# Altium PCB 24line-control-panel.PcbDoc
Units mil, origin at the board's own origin, x right, y up, seen from the top; angles counter-clockwise.
Board outline 15000 x 3500 mil, 2 copper layers (Top Layer, Bottom Layer); 73 components, 50 nets, 205 pads, 0 vias.
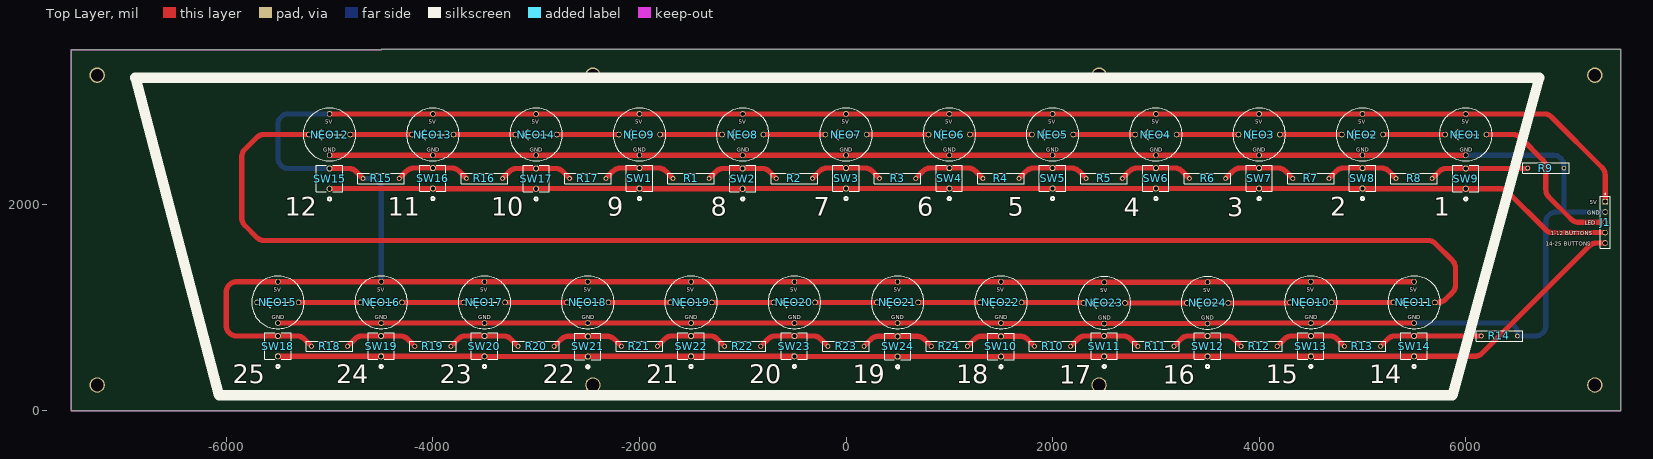
[diagram p0: Top Layer view]
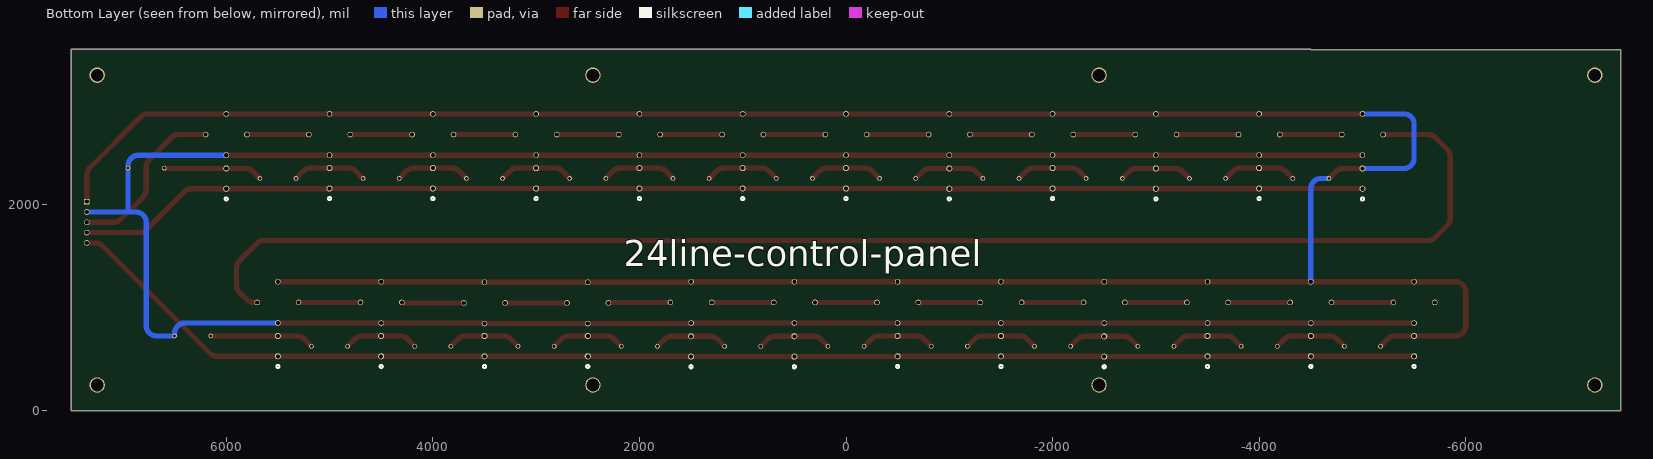
[diagram p1: Bottom Layer view, seen from below]
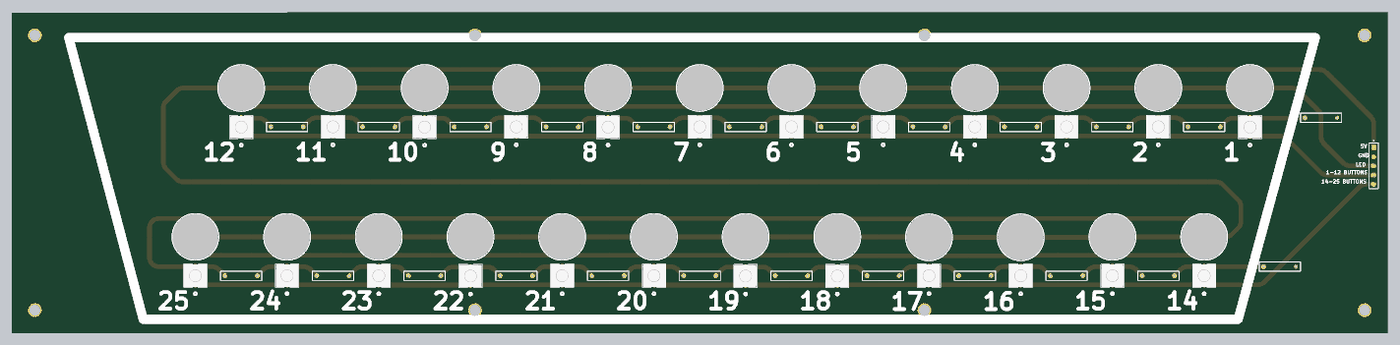
[diagram p2: 3D render of the assembled board from above, using the file's embedded part models]

## Layer stack, top to bottom
Top Solder: solder mask 0.4, Solder Resist, Dk 3.5
Top Layer: signal copper 1.4
Dielectric 1: dielectric 12.6, FR-4, Dk 4.8
Bottom Layer: signal copper 1.4
Bottom Solder: solder mask 0.4, Solder Resist, Dk 3.5

## Board outline
-7500,0 -7500,3495 -4500,3495 -4500,3500 7500,3500 7500,5 7500,0

## Design rules (kind name [scope] priority, off if disabled: settings)
Clearance [All] p1: gap=10 ignorepadtopadclearanceinfootprint=FALSE except(0: Arc-Hole Track-Hole SMDPad-Hole THPad-Hole Via-Hole Fill-Hole Poly-Hole Region-Hole Text-Hole)
PolygonConnect [All] p1: connectstyle=Relief reliefconductorwidth=10 reliefentries=4 polygonreliefangle="90 Angle" airgapwidth=10
RoutingVias [All] p1: holewidth=28 width=50 viastyle="Through Hole" minholewidth=28 minwidth=50 maxholewidth=28 maxwidth=50
SolderMaskExpansion [All] p1: expansion=4 istentingtop=FALSE
Width [All] p1: maxlimit=150 minlimit=10 preferedwidth=50 toplayer_maxwidth=100 minimp=50.000000 maximp=50.000000 favimp=50.000000
30 further rules are at their usual default settings.

## Components (designator, comment, footprint, x,y, rotation, side; value= is the part's Value field where it differs from the comment)
J1 "TSW-105-07-G-S" SAMTEC_TSW-105-07-G-S 7350,1825 r270 top
NEO1 "adafruit-1559-neopixel-flora" adafruit-1559-neopixel-flora 6000,2675 r0 top
NEO2 "adafruit-1559-neopixel-flora" adafruit-1559-neopixel-flora 5000,2675 r0 top
NEO3 "adafruit-1559-neopixel-flora" adafruit-1559-neopixel-flora 4000,2675 r0 top
NEO4 "adafruit-1559-neopixel-flora" adafruit-1559-neopixel-flora 3000,2675 r0 top
NEO5 "adafruit-1559-neopixel-flora" adafruit-1559-neopixel-flora 2000,2675 r0 top
NEO6 "adafruit-1559-neopixel-flora" adafruit-1559-neopixel-flora 1000,2675 r0 top
NEO7 "adafruit-1559-neopixel-flora" adafruit-1559-neopixel-flora 0,2675 r0 top
NEO8 "adafruit-1559-neopixel-flora" adafruit-1559-neopixel-flora -1000,2675 r0 top
NEO9 "adafruit-1559-neopixel-flora" adafruit-1559-neopixel-flora -2000,2675 r0 top
NEO10 "adafruit-1559-neopixel-flora" adafruit-1559-neopixel-flora 4500,1050 r0 top
NEO11 "adafruit-1559-neopixel-flora" adafruit-1559-neopixel-flora 5500,1050 r0 top
NEO12 "adafruit-1559-neopixel-flora" adafruit-1559-neopixel-flora -5000,2675 r0 top
NEO13 "adafruit-1559-neopixel-flora" adafruit-1559-neopixel-flora -4000,2675 r0 top
NEO14 "adafruit-1559-neopixel-flora" adafruit-1559-neopixel-flora -3000,2675 r0 top
NEO15 "adafruit-1559-neopixel-flora" adafruit-1559-neopixel-flora -5500,1050 r0 top
NEO16 "adafruit-1559-neopixel-flora" adafruit-1559-neopixel-flora -4500,1050 r0 top
NEO17 "adafruit-1559-neopixel-flora" adafruit-1559-neopixel-flora -3500,1050 r0 top
NEO18 "adafruit-1559-neopixel-flora" adafruit-1559-neopixel-flora -2500,1050 r0 top
NEO19 "adafruit-1559-neopixel-flora" adafruit-1559-neopixel-flora -1500,1050 r0 top
NEO20 "adafruit-1559-neopixel-flora" adafruit-1559-neopixel-flora -500,1050 r0 top
NEO21 "adafruit-1559-neopixel-flora" adafruit-1559-neopixel-flora 500,1050 r0 top
NEO22 "adafruit-1559-neopixel-flora" adafruit-1559-neopixel-flora 1500,1050 r0 top
NEO23 "adafruit-1559-neopixel-flora" adafruit-1559-neopixel-flora 2500,1045 r0 top
NEO24 "adafruit-1559-neopixel-flora" adafruit-1559-neopixel-flora 3500,1045 r0 top
R1 "Resistor" "thruhole resistor" -1500,2250 r180 top
R2 "Resistor" "thruhole resistor" -500,2250 r180 top
R3 "Resistor" "thruhole resistor" 500,2250 r180 top
R4 "Resistor" "thruhole resistor" 1500,2250 r180 top
R5 "Resistor" "thruhole resistor" 2500,2250 r180 top
R6 "Resistor" "thruhole resistor" 3500,2250 r180 top
R7 "Resistor" "thruhole resistor" 4500,2250 r180 top
R8 "Resistor" "thruhole resistor" 5500,2250 r180 top
R9 "Resistor" "thruhole resistor" 6775,2350 r180 top
R10 "Resistor" "thruhole resistor" 2000,625 r180 top
R11 "Resistor" "thruhole resistor" 3000,625 r180 top
R12 "Resistor" "thruhole resistor" 4000,625 r180 top
R13 "Resistor" "thruhole resistor" 5000,625 r180 top
R14 "Resistor" "thruhole resistor" 6325,725 r180 top
R15 "Resistor" "thruhole resistor" -4500,2250 r180 top
R16 "Resistor" "thruhole resistor" -3500,2250 r180 top
R17 "Resistor" "thruhole resistor" -2500,2250 r180 top
R18 "Resistor" "thruhole resistor" -5000,625 r180 top
R19 "Resistor" "thruhole resistor" -4000,625 r180 top
R20 "Resistor" "thruhole resistor" -3000,625 r180 top
R21 "Resistor" "thruhole resistor" -2000,625 r180 top
R22 "Resistor" "thruhole resistor" -1000,625 r180 top
R23 "Resistor" "thruhole resistor" 0,625 r180 top
R24 "Resistor" "thruhole resistor" 1000,625 r180 top
SW1 "TL59AF100Q" SW_TL59AF100Q_EWI -2000,2153.15 r90 top
SW2 "TL59AF100Q" SW_TL59AF100Q_EWI -1000,2150 r90 top
SW3 "TL59AF100Q" SW_TL59AF100Q_EWI 0,2153.15 r90 top
SW4 "TL59AF100Q" SW_TL59AF100Q_EWI 1000,2153.15 r90 top
SW5 "TL59AF100Q" SW_TL59AF100Q_EWI 2000,2153.15 r90 top
SW6 "TL59AF100Q" SW_TL59AF100Q_EWI 3000,2153.15 r90 top
SW7 "TL59AF100Q" SW_TL59AF100Q_EWI 4000,2153.15 r90 top
SW8 "TL59AF100Q" SW_TL59AF100Q_EWI 5000,2153.15 r90 top
SW9 "TL59AF100Q" SW_TL59AF100Q_EWI 6000,2150 r90 top
SW10 "TL59AF100Q" SW_TL59AF100Q_EWI 1500,525 r90 top
SW11 "TL59AF100Q" SW_TL59AF100Q_EWI 2500,528.15 r90 top
SW12 "TL59AF100Q" SW_TL59AF100Q_EWI 3500,528.15 r90 top
SW13 "TL59AF100Q" SW_TL59AF100Q_EWI 4500,528.15 r90 top
SW14 "TL59AF100Q" SW_TL59AF100Q_EWI 5500,528.15 r90 top
SW15 "TL59AF100Q" SW_TL59AF100Q_EWI -5000,2150 r90 top
SW16 "TL59AF100Q" SW_TL59AF100Q_EWI -4000,2153.15 r90 top
SW17 "TL59AF100Q" SW_TL59AF100Q_EWI -3000,2150 r90 top
SW18 "TL59AF100Q" SW_TL59AF100Q_EWI -5500,528.15 r90 top
SW19 "TL59AF100Q" SW_TL59AF100Q_EWI -4500,528.15 r90 top
SW20 "TL59AF100Q" SW_TL59AF100Q_EWI -3500,528.15 r90 top
SW21 "TL59AF100Q" SW_TL59AF100Q_EWI -2500,525 r90 top
SW22 "TL59AF100Q" SW_TL59AF100Q_EWI -1500,528.15 r90 top
SW23 "TL59AF100Q" SW_TL59AF100Q_EWI -500,528.15 r90 top
SW24 "TL59AF100Q" SW_TL59AF100Q_EWI 500,525 r90 top

## Footprints (in the part's own frame and the unit in brackets; to place one, negate y for a bottom-side part, rotate by r counter-clockwise, add the part's x,y. Pads: shape width x height; smd on the part's side, far side on the other; paste and mask are expansions set on the pad)
adafruit-1559-neopixel-flora [mm]
  round 1.37 hole 1.02: 5V(0,5.08) GND(0,-5.08) IN(5.08,0) OUT(-5.08,0)
  silkscreen extent -6.48,-6.48 6.48,6.48, body extent -6.35,-6.35 6.35,6.35, height 2.4
SAMTEC_TSW-105-07-G-S [mm]
  rect 1.37x1.37 hole 1.02: 01(-5.08,0)
  round 1.37 hole 1.02: 02(-2.54,0) 03(0,0) 04(2.54,0) 05(5.08,0)
  silkscreen extent -7.1,-1.27 6.35,1.27, body extent -6.48,-1.27 6.35,1.27, height 1.44
SW_TL59AF100Q_EWI [mil]
  round 59 / inner round 60 / far side round 59 hole 39 paste-99999 mask+0: 1(0,0) 2(196.85,0)
  silkscreen extent -114,-127 225,127, body extent -24,-122 220,122, height 202
"thruhole resistor" [mil] "thruhole resistor"
  round 45 hole 30: 1(-175,0) 2(175,0)
  silkscreen extent -225,-50 225,50

## Part data
J1: Package=None, Availability=Unavailable, MF="Samtec Inc.", MP=TSW-105-07-G-S, Price=None
SW1 SW2 SW3 SW4 SW5 SW6 SW7 SW8 SW9 SW10 SW11 SW12 SW13 SW14 SW15 SW16 SW17 SW18 SW19 SW20 SW21 SW22 SW23 SW24: "No Description Available", Mfr_Name=E-Switch, Copyright="Copyright (C) 2024 Ultra Librarian. All rights reserved.", Manufacturer_Part_Number=TL59AF100Q, RefDes=RefDes, Type=DEV

## Free pads (board coordinates)
  round 150 hole 123 unplated: 8(-7250,250) 8(-7250,3250) 8(-2450,250) 8(-2450,3250) 8(2450,250) 8(2450,3250) 8(7250,250) 8(7250,3250)

## Nets (pads, with @x,y where several pads share a name; then routed paths per layer and width w, separated by ;. In a path a pad name is that pad's centre, name@x,y a point inside that pad or via, vN(x,y) a via of type N, cw(c..) or ccw(c..) an arc to the next point about the centre after c; other vN are vias at no path point)
GND: J1.02 NEO1.GND NEO2.GND NEO3.GND NEO4.GND NEO5.GND NEO6.GND NEO7.GND NEO8.GND NEO9.GND NEO10.GND NEO11.GND NEO12.GND NEO13.GND NEO14.GND NEO15.GND NEO16.GND NEO17.GND NEO18.GND NEO19.GND NEO20.GND NEO21.GND NEO22.GND NEO23.GND NEO24.GND R9.1 R14.1 | length 26513.3
  Top Layer w50: NEO15.GND NEO16.GND NEO17.GND NEO18.GND NEO19.GND NEO20.GND NEO21.GND NEO22.GND 1500,845 NEO23.GND NEO24.GND 3500,850 NEO10.GND NEO11.GND ; NEO12.GND NEO13.GND NEO14.GND NEO9.GND NEO8.GND NEO7.GND NEO6.GND NEO5.GND NEO4.GND NEO3.GND NEO2.GND NEO1.GND
  Bottom Layer w50: NEO11.GND 6400,850 cw(c6400,750) 6500,750 R14.1 6675,725 ccw(c6675,825) 6775,825 6775,1825 cw(c6875,1825) 6875,1925 6950,1925 ; NEO1.GND 6850,2475 cw(c6850,2375) 6950,2375 R9.1 6950,1925 ; J1.02 6950,1925
NetJ1_01: J1.01 NEO1.5V NEO2.5V NEO3.5V NEO4.5V NEO5.5V NEO6.5V NEO7.5V NEO8.5V NEO9.5V NEO10.5V NEO11.5V NEO12.5V NEO13.5V NEO14.5V NEO15.5V NEO16.5V NEO17.5V NEO18.5V NEO19.5V NEO20.5V NEO21.5V NEO22.5V NEO23.5V NEO24.5V R15.2 R18.2 SW15.2 SW18.2 | length 28615.7
  Top Layer w50: R18.2 -5245.71,695.71 ccw(c-5316.42,625) -5316.42,725 SW18.2 -5900,725 cw(c-5900,825) -6000,825 -6000,1150 cw(c-5900,1150) -5900,1250 NEO15.5V NEO16.5V NEO17.5V NEO18.5V NEO19.5V NEO20.5V NEO21.5V NEO22.5V 1500,1245 NEO23.5V NEO24.5V 3500,1250 NEO10.5V NEO11.5V ; SW15.2 -4813.27,2346.85 cw(c-4813.27,2246.85) -4742.56,2317.56 R15.2 ; NEO12.5V NEO13.5V NEO14.5V NEO9.5V NEO8.5V NEO7.5V NEO6.5V NEO5.5V NEO4.5V NEO3.5V NEO2.5V NEO1.5V 6758.58,2875 cw(c6758.58,2775) 6829.29,2845.71 7320.71,2354.29 cw(c7250,2283.58) 7350,2283.58 J1.01
  Bottom Layer w50: SW15.2 -5400,2346.85 cw(c-5400,2446.85) -5500,2446.85 -5500,2775 cw(c-5400,2775) -5400,2875 NEO12.5V ; R15.2 -4600,2250 cw(c-4600,2150) -4500,2150 NEO16.5V
NetJ1_03: J1.03 NEO1.IN | length 1660.6
  Top Layer w50: NEO1.IN 6458.58,2675 cw(c6458.58,2575) 6529.29,2645.71 6745.71,2429.29 cw(c6675,2358.58) 6775,2358.58 6775,2141.42 ccw(c6875,2141.42) 6804.29,2070.71 7020.71,1854.29 ccw(c7091.42,1925) 7091.42,1825 J1.03
NetJ1_04: J1.04 SW1.1 SW2.1 SW3.1 SW4.1 SW5.1 SW6.1 SW7.1 SW8.1 SW9.1 SW15.1 SW16.1 SW17.1 | length 12522.5
  Top Layer w50: SW15.1 cw(c-4992.4,2142.4) -4992.4,2153.15 SW16.1 ccw(c-3992.4,2160.75) -3992.4,2150 SW17.1 cw(c-2992.4,2142.4) -2992.4,2153.15 SW1.1 ccw(c-1992.4,2160.75) -1992.4,2150 SW2.1 cw(c-992.4,2142.4) -992.4,2153.15 SW3.1 SW4.1 SW5.1 SW6.1 SW7.1 SW8.1 ccw(c5007.6,2160.75) 5007.6,2150 SW9.1 6333.58,2150 cw(c6333.58,2050) 6404.29,2120.71 6770.71,1754.29 ccw(c6841.42,1825) 6841.42,1725 J1.04
NetJ1_05: J1.05 SW10.1 SW11.1 SW12.1 SW13.1 SW14.1 SW18.1 SW19.1 SW20.1 SW21.1 SW22.1 SW23.1 SW24.1 | length 13307.5
  Top Layer w50: SW18.1 SW19.1 SW20.1 ccw(c-3492.4,535.75) -3492.4,525 SW21.1 cw(c-2492.4,517.4) -2492.4,528.15 SW22.1 SW23.1 ccw(c-492.4,535.75) -492.4,525 SW24.1 SW10.1 cw(c1507.6,517.4) 1507.6,528.15 SW11.1 SW12.1 SW13.1 SW14.1 6086.73,528.15 ccw(c6086.73,628.15) 6157.44,557.44 7195.71,1595.71 cw(c7266.42,1525) 7266.42,1625 J1.05
  Bottom Layer w50: 10900,-196.85 ccw(c10907.6,-189.25) 10907.6,-200
NetNEO1_OUT: NEO1.OUT NEO2.IN | length 600
  Top Layer w50: NEO2.IN NEO1.OUT
NetNEO2_OUT: NEO2.OUT NEO3.IN | length 600
  Top Layer w50: NEO3.IN NEO2.OUT
NetNEO3_OUT: NEO3.OUT NEO4.IN | length 600
  Top Layer w50: NEO4.IN NEO3.OUT
NetNEO4_OUT: NEO4.OUT NEO5.IN | length 600
  Top Layer w50: NEO5.IN NEO4.OUT
NetNEO5_OUT: NEO5.OUT NEO6.IN | length 600
  Top Layer w50: NEO6.IN NEO5.OUT
NetNEO6_OUT: NEO6.OUT NEO7.IN | length 600
  Top Layer w50: NEO7.IN NEO6.OUT
NetNEO7_OUT: NEO7.OUT NEO8.IN | length 600
  Top Layer w50: NEO8.IN NEO7.OUT
NetNEO8_OUT: NEO8.OUT NEO9.IN | length 600
  Top Layer w50: NEO9.IN NEO8.OUT
NetNEO9_OUT: NEO9.OUT NEO14.IN | length 600
  Top Layer w50: NEO14.IN NEO9.OUT
NetNEO10_IN: NEO10.IN NEO11.OUT | length 600
  Top Layer w50: NEO10.IN NEO11.OUT
NetNEO10_OUT: NEO10.OUT NEO24.IN | length 605
  Top Layer w50: NEO24.IN 4300,1045 NEO10.OUT
NetNEO11_IN: NEO11.IN NEO12.OUT | length 13780.5
  Top Layer w50: NEO12.OUT -5633.58,2675 ccw(c-5633.58,2575) -5704.29,2645.71 -5820.71,2529.29 ccw(c-5750,2458.58) -5850,2458.58 -5850,1866.42 ccw(c-5750,1866.42) -5820.71,1795.71 -5704.29,1679.29 ccw(c-5633.58,1750) -5633.58,1650 5633.58,1650 cw(c5633.58,1550) 5704.29,1620.71 5870.71,1454.29 cw(c5800,1383.58) 5900,1383.58 5900,1216.42 cw(c5800,1216.42) 5870.71,1145.71 5804.29,1079.29 cw(c5733.58,1150) 5733.58,1050 NEO11.IN
NetNEO12_IN: NEO12.IN NEO13.OUT | length 600
  Top Layer w50: NEO12.IN NEO13.OUT
NetNEO13_IN: NEO13.IN NEO14.OUT | length 600
  Top Layer w50: NEO13.IN NEO14.OUT
NetNEO15_IN: NEO15.IN NEO16.OUT | length 600
  Top Layer w50: NEO15.IN NEO16.OUT
NetNEO16_IN: NEO16.IN NEO17.OUT | length 600
  Top Layer w50: NEO16.IN NEO17.OUT
NetNEO17_IN: NEO17.IN NEO18.OUT | length 600
  Top Layer w50: NEO17.IN NEO18.OUT
NetNEO18_IN: NEO18.IN NEO19.OUT | length 600
  Top Layer w50: NEO18.IN NEO19.OUT
NetNEO19_IN: NEO19.IN NEO20.OUT | length 600
  Top Layer w50: NEO19.IN NEO20.OUT
NetNEO20_IN: NEO20.IN NEO21.OUT | length 600
  Top Layer w50: NEO20.IN NEO21.OUT
NetNEO21_IN: NEO21.IN NEO22.OUT | length 600
  Top Layer w50: NEO21.IN NEO22.OUT
NetNEO22_IN: NEO22.IN NEO23.OUT | length 605
  Top Layer w50: NEO22.IN 2300,1050 NEO23.OUT
NetNEO23_IN: NEO23.IN NEO24.OUT | length 600
  Top Layer w50: NEO23.IN NEO24.OUT
NetR1_1: R1.1 R2.2 SW2.2 | length 721.6
  Top Layer w50: R1.1 -1257.44,2317.56 cw(c-1186.73,2246.85) -1186.73,2346.85 SW2.2 -813.27,2346.85 cw(c-813.27,2246.85) -742.56,2317.56 R2.2
NetR1_2: R1.2 R17.1 SW1.2 | length 724.2
  Top Layer w50: R17.1 -2254.29,2320.71 cw(c-2183.58,2250) -2183.58,2350 SW1.2 -1816.42,2350 cw(c-1816.42,2250) -1745.71,2320.71 R1.2
NetR2_1: R2.1 R3.2 SW3.2 | length 724.2
  Top Layer w50: R2.1 -254.29,2320.71 cw(c-183.58,2250) -183.58,2350 SW3.2 183.58,2350 cw(c183.58,2250) 254.29,2320.71 R3.2
NetR3_1: R3.1 R4.2 SW4.2 | length 724.2
  Top Layer w50: R3.1 745.71,2320.71 cw(c816.42,2250) 816.42,2350 SW4.2 1183.58,2350 cw(c1183.58,2250) 1254.29,2320.71 R4.2
NetR4_1: R4.1 R5.2 SW5.2 | length 724.2
  Top Layer w50: R4.1 1745.71,2320.71 cw(c1816.42,2250) 1816.42,2350 SW5.2 2183.58,2350 cw(c2183.58,2250) 2254.29,2320.71 R5.2
NetR5_1: R5.1 R6.2 SW6.2 | length 724.2
  Top Layer w50: R5.1 2745.71,2320.71 cw(c2816.42,2250) 2816.42,2350 SW6.2 3183.58,2350 cw(c3183.58,2250) 3254.29,2320.71 R6.2
NetR6_1: R6.1 R7.2 SW7.2 | length 724.2
  Top Layer w50: R6.1 3745.71,2320.71 cw(c3816.42,2250) 3816.42,2350 SW7.2 4183.58,2350 cw(c4183.58,2250) 4254.29,2320.71 R7.2
NetR7_1: R7.1 R8.2 SW8.2 | length 724.2
  Top Layer w50: R7.1 4745.71,2320.71 cw(c4816.42,2250) 4816.42,2350 SW8.2 5183.58,2350 cw(c5183.58,2250) 5254.29,2320.71 R8.2
NetR8_1: R8.1 R9.2 SW9.2 | length 961.7
  Top Layer w50: R8.1 5742.56,2317.56 cw(c5813.27,2246.85) 5813.27,2346.85 SW9.2 6592.4,2346.85 ccw(c6592.4,2357.6) R9.2
NetR10_1: R10.1 R11.2 SW11.2 | length 724.2
  Top Layer w50: R10.1 2245.71,695.71 cw(c2316.42,625) 2316.42,725 SW11.2 2683.58,725 cw(c2683.58,625) 2754.29,695.71 R11.2
NetR10_2: R10.2 R24.1 SW10.2 | length 721.6
  Top Layer w50: R24.1 1242.56,692.56 cw(c1313.27,621.85) 1313.27,721.85 SW10.2 1686.73,721.85 cw(c1686.73,621.85) 1757.44,692.56 R10.2
NetR11_1: R11.1 R12.2 SW12.2 | length 724.2
  Top Layer w50: R11.1 3245.71,695.71 cw(c3316.42,625) 3316.42,725 SW12.2 3683.58,725 cw(c3683.58,625) 3754.29,695.71 R12.2
NetR12_1: R12.1 R13.2 SW13.2 | length 724.2
  Top Layer w50: R12.1 4245.71,695.71 cw(c4316.42,625) 4316.42,725 SW13.2 4683.58,725 cw(c4683.58,625) 4754.29,695.71 R13.2
NetR13_1: R13.1 R14.2 SW14.2 | length 1012.1
  Top Layer w50: R13.1 5245.71,695.71 cw(c5316.42,625) 5316.42,725 SW14.2 R14.2
NetR15_1: R15.1 R16.2 SW16.2 | length 724.2
  Top Layer w50: R15.1 -4254.29,2320.71 cw(c-4183.58,2250) -4183.58,2350 SW16.2 -3816.42,2350 cw(c-3816.42,2250) -3745.71,2320.71 R16.2
NetR16_1: R16.1 R17.2 SW17.2 | length 721.6
  Top Layer w50: R16.1 -3257.44,2317.56 cw(c-3186.73,2246.85) -3186.73,2346.85 SW17.2 -2813.27,2346.85 cw(c-2813.27,2246.85) -2742.56,2317.56 R17.2
NetR18_1: R18.1 R19.2 SW19.2 | length 724.2
  Top Layer w50: R18.1 -4754.29,695.71 cw(c-4683.58,625) -4683.58,725 SW19.2 -4316.42,725 cw(c-4316.42,625) -4245.71,695.71 R19.2
NetR19_1: R19.1 R20.2 SW20.2 | length 724.2
  Top Layer w50: R19.1 -3754.29,695.71 cw(c-3683.58,625) -3683.58,725 SW20.2 -3316.42,725 cw(c-3316.42,625) -3245.71,695.71 R20.2
NetR20_1: R20.1 R21.2 SW21.2 | length 721.6
  Top Layer w50: R20.1 -2757.44,692.56 cw(c-2686.73,621.85) -2686.73,721.85 SW21.2 -2313.27,721.85 cw(c-2313.27,621.85) -2242.56,692.56 R21.2
NetR21_1: R21.1 R22.2 SW22.2 | length 724.2
  Top Layer w50: R21.1 -1754.29,695.71 cw(c-1683.58,625) -1683.58,725 SW22.2 -1316.42,725 cw(c-1316.42,625) -1245.71,695.71 R22.2
NetR22_1: R22.1 R23.2 SW23.2 | length 724.2
  Top Layer w50: R22.1 -754.29,695.71 cw(c-683.58,625) -683.58,725 SW23.2 -316.42,725 cw(c-316.42,625) -245.71,695.71 R23.2
NetR23_1: R23.1 R24.2 SW24.2 | length 721.6
  Top Layer w50: R23.1 242.56,692.56 cw(c313.27,621.85) 313.27,721.85 SW24.2 686.73,721.85 cw(c686.73,621.85) 757.44,692.56 R24.2
pads on no net: NEO15.OUT

## Keep-outs
Keep-Out Layer:
  lines w10: -4500,3495 -7500,3495 -7500,0 -4500,0 7500,0 ; -4500,3500 7500,3500 7500,2580 7500,930 7500,5

## Silkscreen, mask and mechanical layers (free items; w line width, h text height)
Top Overlay:
  lines w10: -5575,1000 -5625,1050 ; -5575,1100 -5625,1050 ; -5375,1050 -5625,1050 ; -5075,2625 -5125,2675 ; -5075,2725 -5125,2675 ; -4875,2675 -5125,2675 ; -4575,1000 -4625,1050 ; -4575,1100 -4625,1050 ; -4375,1050 -4625,1050 ; -4075,2625 -4125,2675 ; -4075,2725 -4125,2675 ; -3875,2675 -4125,2675 ; -3575,1000 -3625,1050 ; -3575,1100 -3625,1050 ; -3375,1050 -3625,1050 ; -3075,2625 -3125,2675 ; -3075,2725 -3125,2675 ; -2875,2675 -3125,2675 ; -2575,1000 -2625,1050 ; -2575,1100 -2625,1050 ; -2375,1050 -2625,1050 ; -2075,2625 -2125,2675 ; -2075,2725 -2125,2675 ; -1875,2675 -2125,2675 ; -1575,1000 -1625,1050 ; -1575,1100 -1625,1050 ; -1375,1050 -1625,1050 ; -1075,2625 -1125,2675 ; -1075,2725 -1125,2675 ; -875,2675 -1125,2675 ; -575,1000 -625,1050 ; -575,1100 -625,1050 ; -375,1050 -625,1050 ; -75,2625 -125,2675 ; -75,2725 -125,2675 ; 125,2675 -125,2675 ; 425,1000 375,1050 ; 425,1100 375,1050 ; 625,1050 375,1050 ; 925,2625 875,2675 ; 925,2725 875,2675 ; 1125,2675 875,2675 ; 1425,1000 1375,1050 ; 1425,1100 1375,1050 ; 1625,1050 1375,1050 ; 1925,2625 1875,2675 ; 1925,2725 1875,2675 ; 2125,2675 1875,2675 ; 2425,995 2375,1045 ; 2425,1095 2375,1045 ; 2625,1045 2375,1045 ; 2925,2625 2875,2675 ; 2925,2725 2875,2675 ; 3125,2675 2875,2675 ; 3425,995 3375,1045 ; 3425,1095 3375,1045 ; 3625,1045 3375,1045 ; 3925,2625 3875,2675 ; 3925,2725 3875,2675 ; 4125,2675 3875,2675 ; 4425,1000 4375,1050 ; 4425,1100 4375,1050 ; 4625,1050 4375,1050 ; 4925,2625 4875,2675 ; 4925,2725 4875,2675 ; 5125,2675 4875,2675 ; 5425,1000 5375,1050 ; 5425,1100 5375,1050 ; 5625,1050 5375,1050 ; 5925,2625 5875,2675 ; 5925,2725 5875,2675 ; 6125,2675 5875,2675
  lines w100: -6880.66,3225 -6068.4,150 5870.28,150 6711.56,3225 -6880.66,3225
  text "5V" at -5040,2780 h39.37
  text "5V" at -4040,2780 h39.37
  text "5V" at -3040,2780 h39.37
  text "5V" at -2040,2780 h39.37
  text "5V" at -1040,2780 h39.37
  text "5V" at -40,2780 h39.37
  text "5V" at 960,2780 h39.37
  text "5V" at 1960,2780 h39.37
  text "5V" at 2960,2780 h39.37
  text "5V" at 3960,2780 h39.37
  text "5V" at 4960,2780 h39.37
  text "5V" at 5960,2780 h39.37
  text "GND" at -5060,2510 h39.37
  text "GND" at -4060,2510 h39.37
  text "GND" at -3060,2510 h39.37
  text "GND" at -2060,2510 h39.37
  text "GND" at -1060,2510 h39.37
  text "GND" at -60,2510 h39.37
  text "GND" at 940,2510 h39.37
  text "GND" at 1940,2510 h39.37
  text "GND" at 2940,2510 h39.37
  text "GND" at 3940,2510 h39.37
  text "GND" at 4940,2510 h39.37
  text "GND" at 5940,2510 h39.37
  text "5V" at 7200,2000 h39.37
  text "GND" at 7175,1900 h39.37
  text "12" at -5435,1890 h180
  text "11" at -4435,1890 h180
  text "10" at -3435,1890 h180
  text "9" at -2310,1890 h180
  text "8" at -1310,1890 h180
  text "7" at -310,1890 h180
  text "6" at 690,1890 h180
  text "5" at 1565,1890 h180
  text "2" at 4690,1890 h180
  text "1" at 5690,1890 h180
  text "4" at 2690,1885 h180
  text "3" at 3690,1885 h180
  text "LED" at 7150,1800 h39.37
  text "1-12 BUTTONS" at 6825,1700 h39.37
  text "14-25 BUTTONS" at 6775,1600 h39.37
  text "5V" at -5540,1155 h39.37
  text "5V" at -4540,1155 h39.37
  text "5V" at -3540,1155 h39.37
  text "5V" at -2540,1155 h39.37
  text "5V" at -1540,1155 h39.37
  text "5V" at -540,1155 h39.37
  text "5V" at 460,1155 h39.37
  text "5V" at 1460,1155 h39.37
  text "5V" at 4460,1155 h39.37
  text "5V" at 5460,1155 h39.37
  text "5V" at 2460,1150 h39.37
  text "5V" at 3460,1150 h39.37
  text "GND" at -5560,885 h39.37
  text "GND" at -4560,885 h39.37
  text "GND" at -3560,885 h39.37
  text "GND" at -2560,885 h39.37
  text "GND" at -1560,885 h39.37
  text "GND" at -560,885 h39.37
  text "GND" at 440,885 h39.37
  text "GND" at 1440,885 h39.37
  text "GND" at 4440,885 h39.37
  text "GND" at 5440,885 h39.37
  text "GND" at 2440,880 h39.37
  text "GND" at 3440,880 h39.37
  text "25" at -5935,265 h180
  text "24" at -4935,265 h180
  text "23" at -3935,265 h180
  text "22" at -2935,265 h180
  text "21" at -1935,265 h180
  text "20" at -935,265 h180
  text "19" at 65,265 h180
  text "18" at 1065,265 h180
  text "15" at 4065,265 h180
  text "14" at 5065,265 h180
  text "17" at 2065,260 h180
  text "16" at 3065,260 h180
Bottom Overlay:
  text "24line-control-panel" at 2150,1400 h250